# EAGLE board introAu (EAGLE 7.3.0)
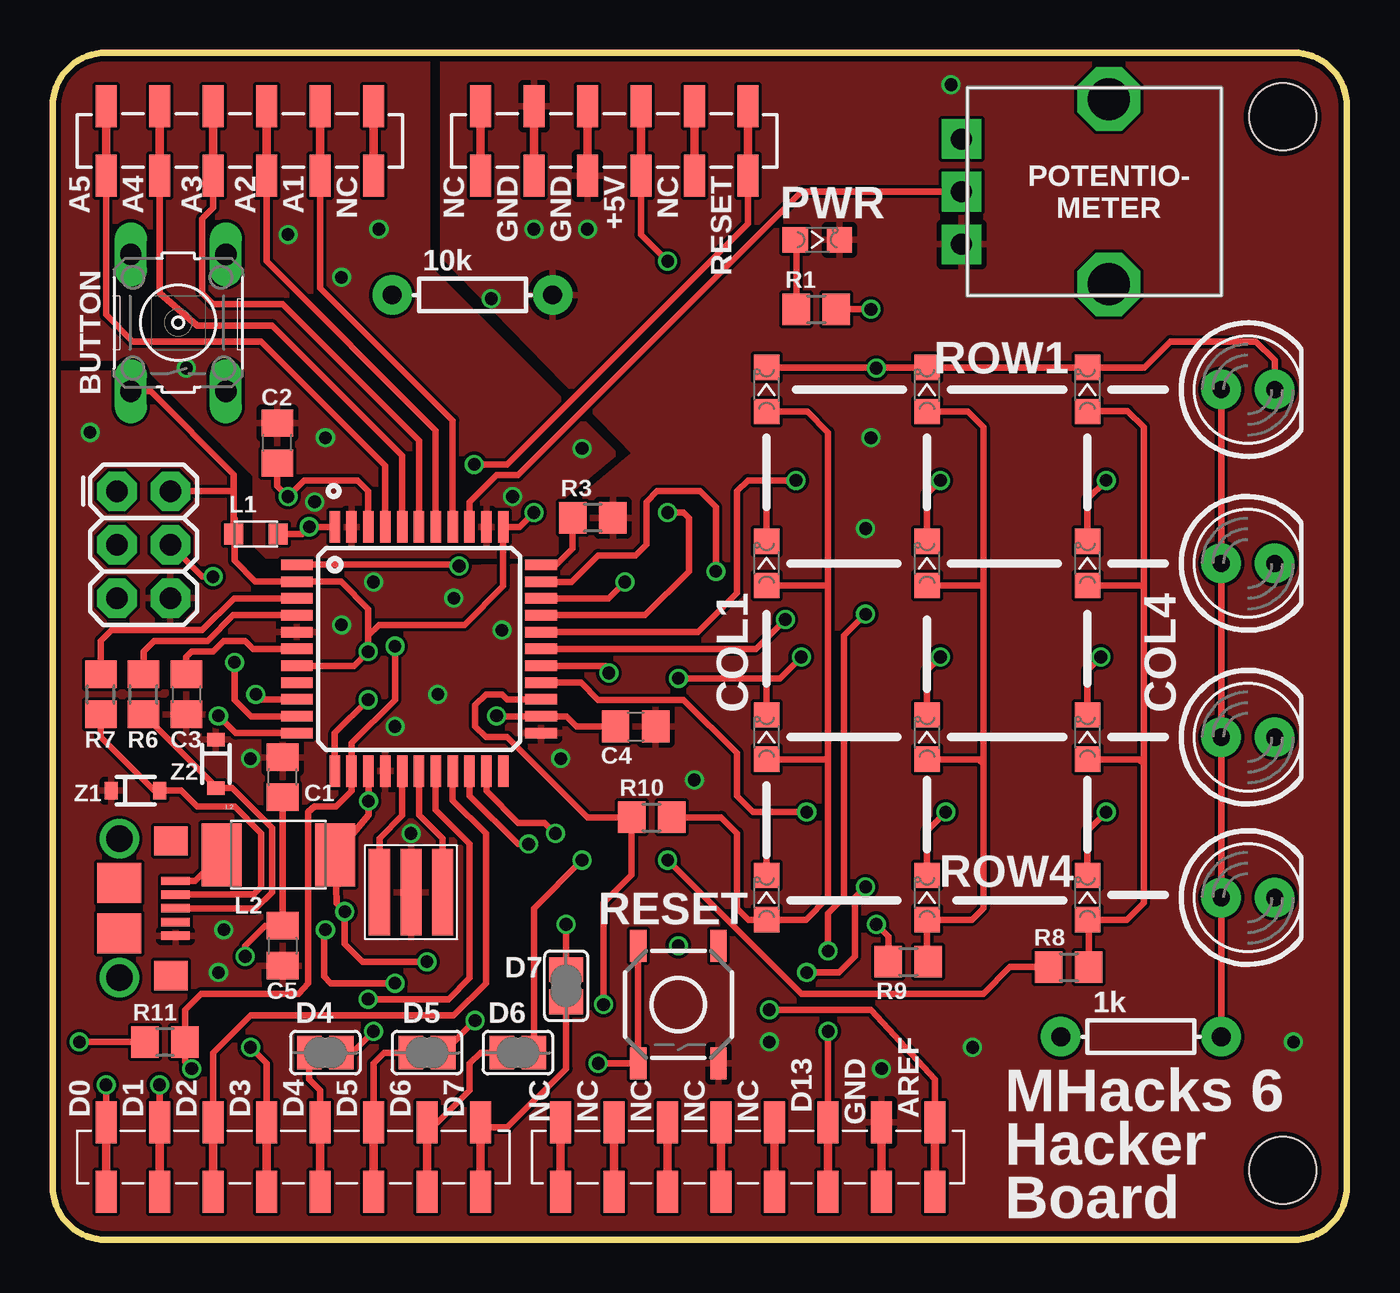
[diagram p0: board, top side]
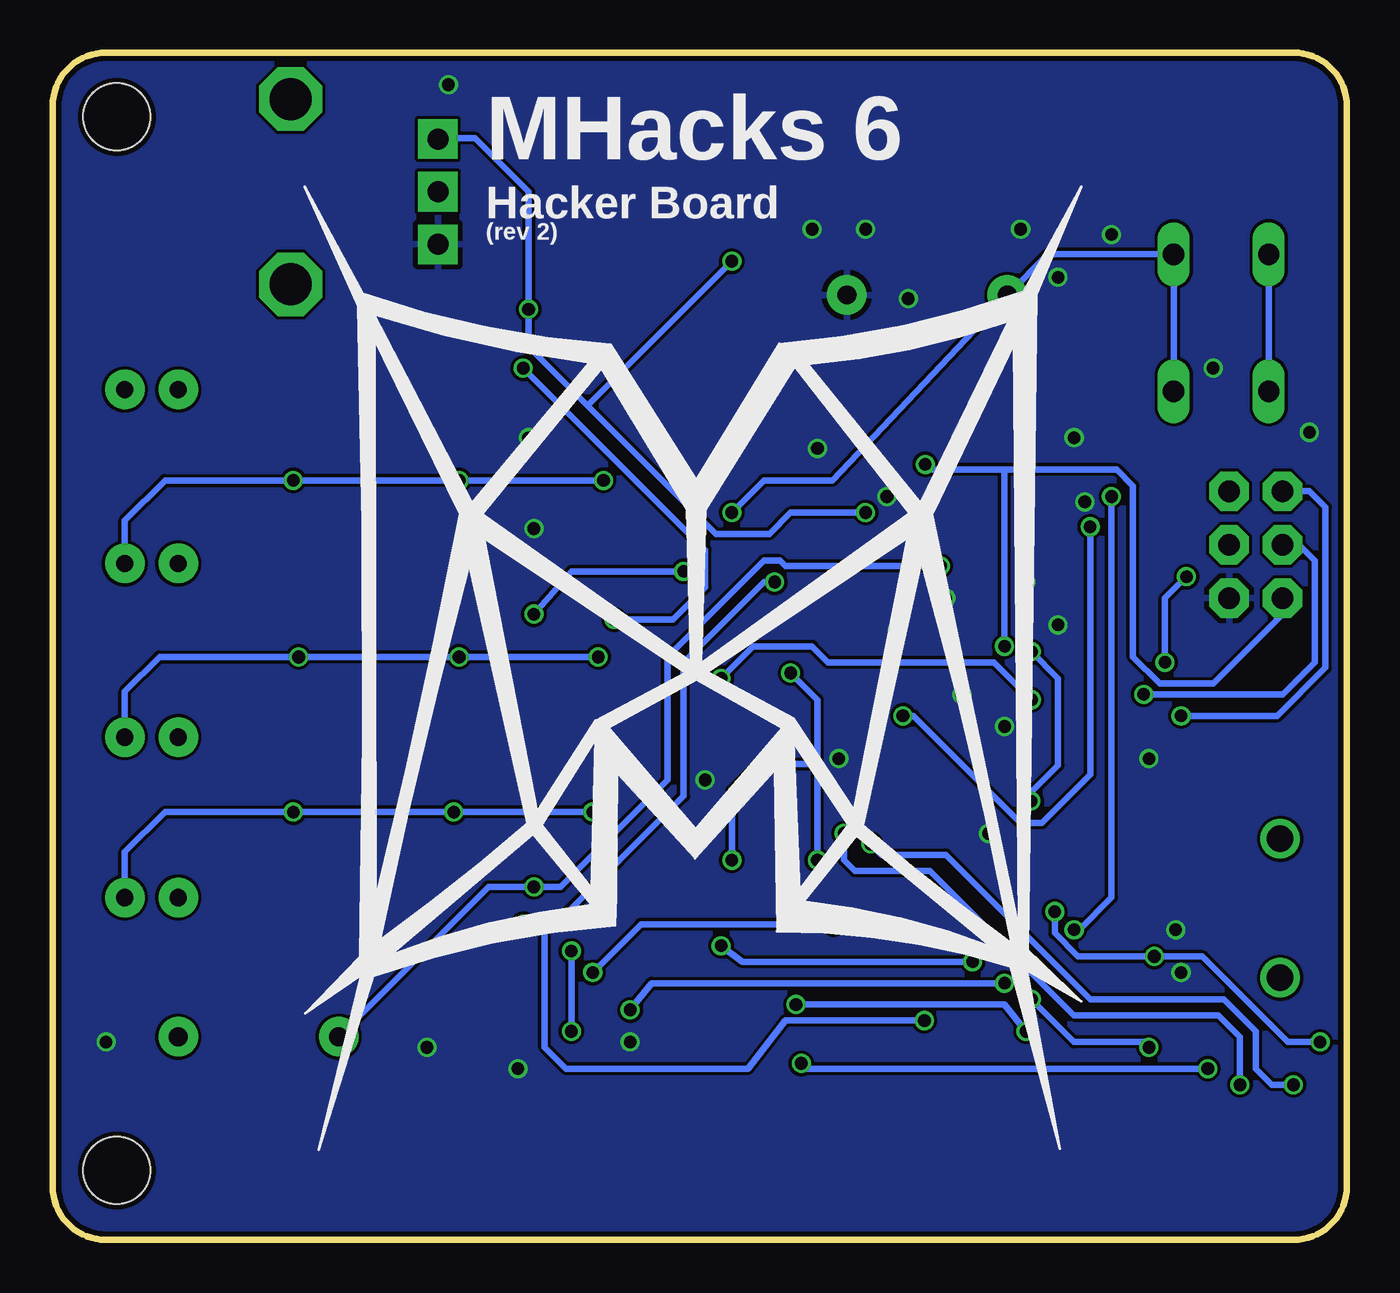
[diagram p1: board, bottom side, seen from below]

Size 61.47 x 56.39 mm. Coordinates in mm from the lower left corner, seen from the top.
Outline: 2.54,56.39 58.93,56.39 arc-90 61.47,53.85 61.47,2.54 arc-90 58.93,0 2.54,0 arc-90 0,2.54 0,53.85 arc-90 2.54,56.39
Copper layers (1*16): Top 0.035mm / dielectric 1.5mm / Bottom 0.035mm
Design rules "SeeedStudio_2layer_DRU_no_angle_20140221": minimum track width 6mil, minimum drill 12mil, track to track 6mil, track to pad 6mil, pad to pad 6mil, via to via 6mil, smd to smd 0mil, copper to edge 10mil, drill to drill 10mil, minimum pad ring 10mil, minimum via ring 6mil, stop-mask expansion 2mil, vias tented up to drill 100mil, thermal gap 10mil
Holes 3.17 mm at 58.42,3.3 58.42,53.34

## Footprints (pad centres in the part's own frame; a part is rotated, then mirrored left to right if it is on the bottom)
C0805 = smd 1.3 x 1.5: 1 -0.95,0; 2 0.95,0
SJ = smd 1.168 x 1.6: 1 -0.762,0; 2 0.762,0
1X06_SMD_STRAIGHT_COMBO = smd 1 x 2: 1 0,-1.65; 1-2 0,1.65; 2 2.54,1.65; 2-2 2.54,-1.65; 3 5.08,-1.65; 3-2 5.08,1.65; 4 7.62,1.65; 4-2 7.62,-1.65; 5 10.16,-1.65; 5-2 10.16,1.65; 6 12.7,1.65; 6-2 12.7,-1.65
1X08_SMD_COMBINED = smd 1 x 2: 1 0,1.65; 1@2 0,-1.65; 2 2.54,-1.65; 2@2 2.54,1.65; 3 5.08,1.65; 3@2 5.08,-1.65; 4 7.62,-1.65; 4@2 7.62,1.65; 5 10.16,1.65; 5@2 10.16,-1.65; 6 12.7,-1.65; 6@2 12.7,1.65; 7 15.24,1.65; 7@2 15.24,-1.65; 8 17.78,-1.65; 8@2 17.78,1.65
2X3 = drill 1.016 pad 1.88 octagon: 1 0,0; 2 0,2.54; 3 2.54,0; 4 2.54,2.54; 5 5.08,0; 6 5.08,2.54
WE-CBF_0805(W=3.0) = smd 0.9 x 1: 1 -1.05,0; 2 1.05,0
WE-CBF_1812(W=7.3) = smd 1.9 x 3: 1 -2.7,0; 2 2.7,0
LED5MM = drill 0.813 pad 1.88: A -1.27,0; K 1.27,0
CHIPLED_0805 = smd 1.2 x 1.2: A 0,-1.05; C 0,1.05
CERAMIC_RESONATOR_SMD = smd 1 x 4.1: 1 -1.5,0; 2 0,0; 3 1.5,0
R0805 = smd 1.3 x 1.5: 1 -0.95,0; 2 0.95,0
AXIAL-0.3EZ = drill 0.9 pad 1.88: P$1 -3.81,0; P$2 3.81,0
B3F-10XX = drill 1.016 long: 1 -3.251,2.261; 2 3.251,2.261; 3 -3.251,-2.261; 4 3.251,-2.261
TACTILE-SWITCH-SMD = smd 1.524 x 0.762: 1 -2.794,1.905; 2 2.794,1.905; 3 -2.794,-1.905; 4 2.794,-1.905
SPARKFUN-DIGITALIC_TQFP44 = smd 1.5 x 0.5: 1 -5.8,4; 2 -5.8,3.2; 3 -5.8,2.4; 4 -5.8,1.6; 5 -5.8,0.8; 6 -5.8,0; 7 -5.8,-0.8; 8 -5.8,-1.6; 9 -5.8,-2.4; 10 -5.8,-3.2; 11 -5.8,-4; 23 5.8,-4; 24 5.8,-3.2; 25 5.8,-2.4; 26 5.8,-1.6; 27 5.8,-0.8; 28 5.8,0; 29 5.8,0.8; 30 5.8,1.6; 31 5.8,2.4; 32 5.8,3.2; 33 5.8,4 | smd 0.5 x 1.5: 12 -4,-5.8; 13 -3.2,-5.8; 14 -2.4,-5.8; 15 -1.6,-5.8; 16 -0.8,-5.8; 17 0,-5.8; 18 0.8,-5.8; 19 1.6,-5.8; 20 2.4,-5.8; 21 3.2,-5.8; 22 4,-5.8; 34 4,5.8; 35 3.2,5.8; 36 2.4,5.8; 37 1.6,5.8; 38 0.8,5.8; 39 0,5.8; 40 -0.8,5.8; 41 -1.6,5.8; 42 -2.4,5.8; 43 -3.2,5.8; 44 -4,5.8
USB_MICROB_CHEAPER = smd 0.4 x 1.35: P$1 -1.3,0; P$2 -0.65,0; P$3 0,0; P$4 0.65,0; P$5 1.3,0 | smd 1.4 x 1.6: P$6 -3.2,-0.225; P$7 3.2,-0.225 | drill 1.25: P$8 -3.3,-2.675; P$9 3.3,-2.675 | smd 1.9 x 2.1: P$10 -1.2,-2.675; P$12 1.2,-2.675
ALPS_POT = drill 1 pad 1.88 square: P$1 7,-2.5; P$2 7,0; P$3 7,2.5 | drill 2 octagon: P$4 0,-4.4; P$5 0,4.4
SOD-323 = smd 0.63 x 0.83: 1 -1.15,0; 2 1.15,0

## Placement (x,y rotation side)
C1  100nF  [C0805]  10.92,21.97 90 top
C2  100nF  [C0805]  10.67,37.85 90 top
C3  1uF  [C0805]  6.35,25.91 270 top
C4  1uF  [C0805]  27.69,24.38 0 top
C5  10uF  [C0805]  10.92,13.97 270 top
D4  [SJ]  12.95,8.89 180 top
D5  [SJ]  17.78,8.89 180 top
D6  [SJ]  22.1,8.89 180 top
D7  [SJ]  24.38,12.06 270 top
JP1  [1X06_SMD_STRAIGHT_COMBO]  15.24,52.2 180 top
JP2  [1X06_SMD_STRAIGHT_COMBO]  33.02,52.2 180 top
JP3  [1X08_SMD_COMBINED]  20.32,3.94 180 top
JP4  [1X08_SMD_COMBINED]  41.91,3.94 180 top
JP5  [2X3]  3.05,35.56 270 top
L1  [WE-CBF_0805(W=3.0)]  9.65,33.53 0 top
L2  MF-MSMF050-2  [WE-CBF_1812(W=7.3)]  10.72,18.29 0 top
LED4  [LED5MM]  56.77,40.39 0 top
LED9  [LED5MM]  56.77,32.13 0 top
LED10  [LED5MM]  56.77,23.88 0 top
LED14  [LED5MM]  56.77,16.26 0 top
LED17  [CHIPLED_0805]  41.53,32.13 0 top
LED18  [CHIPLED_0805]  41.53,23.88 0 top
LED19  [CHIPLED_0805]  41.53,16.26 0 top
LED20  [CHIPLED_0805]  33.91,16.26 0 top
LED21  [CHIPLED_0805]  33.91,23.88 0 top
LED22  [CHIPLED_0805]  33.91,32.13 0 top
LED23  [CHIPLED_0805]  41.53,40.39 0 top
LED24  [CHIPLED_0805]  49.15,32.13 0 top
LED25  [CHIPLED_0805]  49.15,23.88 0 top
LED26  [CHIPLED_0805]  49.15,16.26 0 top
LED27  [CHIPLED_0805]  49.15,40.39 0 top
LED28  [CHIPLED_0805]  33.91,40.39 0 top
PWR  [CHIPLED_0805]  36.32,47.5 270 top
Q1  CERAMIC_RESONATOR_SMD  [CERAMIC_RESONATOR_SMD]  17.02,16.51 180 top
R1  1k  [R0805]  36.27,44.2 0 top
R2  1k  [AXIAL-0.3EZ]  51.69,9.65 0 top
R3  10k  [R0805]  25.65,34.29 180 top
R5  10k  [AXIAL-0.3EZ]  19.94,44.88 0 top
R6  22  [R0805]  4.32,25.91 90 top
R7  22  [R0805]  2.29,25.91 90 top
R8  1k  [R0805]  48.26,12.95 0 top
R9  1k  [R0805]  40.64,13.21 0 top
R10  1k  [R0805]  28.45,20.07 0 top
R11  10k  [R0805]  5.33,9.4 180 top
S1  [B3F-10XX]  5.97,43.56 90 top
S2  TAC_SWITCHSMD  [TACTILE-SWITCH-SMD]  29.72,11.18 270 top
U$1  [MHACKS6-BIG]  49.53,4.32 0 bottom
U$2  ATMEGA32U4TQFP  [SPARKFUN-DIGITALIC_TQFP44]  17.4,28.07 0 top
U$3  USB_MICROB_0001LF  [USB_MICROB_CHEAPER]  5.84,15.75 270 top
U$5  [ALPS_POT]  50.16,49.78 180 top
Z1  3.6V Zener  [SOD-323]  3.94,21.34 0 top
Z2  3.6V Zener  [SOD-323]  7.75,22.61 270 top

## Library data of the parts
C1-C5 R1 R3 R6-R11 = rcl
D4-D7 = jumper
JP1-JP5 = SparkFun-Connectors
L1 L2 = EagleLibrary_Wuerth_Elektronik_eiSos_rev15c
LED4 LED9 LED10 LED14 = SparkFun-LED
LED17-LED28 PWR = led
Q1 = MESH_Arduino
R2 R5 = SparkFun-Resistors; PROD_ID: RES-08380
S1 = MESH_Arduino; MPN: B3F-1000; OC_FARNELL: 176432; OC_NEWARK: 36M3542
S2 = mBLE; PROD_ID: SWCH-08247
U$1 = artwork
U$2 = SparkFun-DigitalIC
U$3 = mBLE
U$5 = SparkFun-Electromechanical
Z1 Z2 = SparkFun-DiscreteSemi

## Nets
+3V3: JP2.2
+5V: C1.1 C5.1 JP2.3 JP5.2 L1.1 L2.2 R1.2 R11.2 S1.1 S1.2 U$2.2 U$2.7 U$2.14 U$2.34 U$5.P$1
A1: JP1.2 U$2.37
A2: JP1.3 U$2.38
A3: JP1.4 U$2.39
A4: JP1.5 U$2.40
A5: JP1.6 U$2.41
AREF: C2.1 JP4.1 U$2.42
BUTTON: R5.P$1 S1.3 S1.4 U$2.30
COL1: LED20.A LED21.A LED22.A LED28.A R10.2
COL2: LED17.A LED18.A LED19.A LED23.A R9.2
COL3: LED24.A LED25.A LED26.A LED27.A R8.2
COL4: LED4.A LED9.A LED10.A LED14.A R2.P$2
D0: JP3.8 U$2.20
D1: JP3.7 U$2.21
D2: JP3.6 U$2.19
D3: JP3.5 U$2.18
D4: D4.1 R10.1 U$2.25
D5: D5.1 R9.1 U$2.31
D6: D6.1 R8.1 U$2.27
D7: D7.1 R2.P$1 U$2.1
D8: JP4.8
D9: JP4.7
D10: JP4.6
D11: JP4.5
D12: JP4.4
D13: JP4.3 U$2.32
D17: U$2.8
GND: C1.2 C2.2 C3.2 C4.2 C5.2 JP2.4 JP2.5 JP4.2 JP5.6 PWR.C Q1.2 R3.1 R5.P$2 S2.2 U$2.5 U$2.15 U$2.23 U$2.35 U$2.43 U$3.P$5 U$5.P$3 Z1.1 Z2.1
MISO: JP5.1 U$2.11
MOSI: JP5.4 U$2.10
N$1: L2.1 U$3.P$1
N$5: Q1.3 U$2.16
N$6: Q1.1 U$2.17
N$7: R7.1 U$3.P$2 Z1.2
N$8: R3.2 U$2.33
N$9: R6.1 U$3.P$3 Z2.2
N$10: C4.1 L1.2 U$2.24 U$2.44
N$11: PWR.A R1.1
N$12: D7.2 JP3.1
N$15: D5.2 JP3.3
N$16: D6.2 JP3.2
N$17: D4.2 JP3.4
POT: U$2.36 U$5.P$2
RD+: R6.2 U$2.4
RD-: R7.2 U$2.3
RESET: JP2.1 JP5.5 R11.1 S2.3 S2.4 U$2.13
ROW1: LED4.K LED23.C LED27.C LED28.C U$2.28
ROW2: LED9.K LED17.C LED22.C LED24.C U$2.29
ROW3: LED10.K LED18.C LED21.C LED25.C U$2.12
ROW4: LED14.K LED19.C LED20.C LED26.C U$2.26
SCK: JP5.3 U$2.9
TX: U$2.22
UCAP: C3.1 U$2.6
VIN: JP2.6

## Tracks (layer width: path | path; a pad name or v marks a point on that pad's centre or on a via)
+5V  (via drill 0.6)
  Top 0.305: U$2.7 14.31,27.27 v14.99,27.94 14.99,28.7 | U$2.14 v15,20.84 15,20.17 L2.2 | R1.2 v38.86,44.2 | 14.99,28.7 14.99,29.97 13.69,31.27 U$2.2 9.63,31.27 8.64,32.26 8.64,34.26 L1.1 8.6,35.56 | v22.86,34.54 22.18,33.87 U$2.34 21.4,31.05 19.56,29.21 15.49,29.21 14.99,28.7 | v17.78,13.21 14.73,13.21 13.88,14.06 v13.88,15.59 | 8.6,35.56 8.6,36.36 4.65,40.31 S1.1 | JP5.2 8.6,35.56 | C1.1 C5.1 10.09,14.92 9.14,13.97 v9.14,13.46 | JP2.3 27.94,47.75 v29.21,46.48 | R11.2 v1.27,9.4 | 13.62,16.92 L2.2 | 13.62,15.84 v13.88,15.59 | L2.2 13.49,15.97 v13.88,15.59
  Top 0.406: L2.2 13.75,18.67
  Bottom 0.305: S1.1 S1.2 | v15,20.84 15,21.25 13.72,22.53 13.72,26.67 v14.99,27.94 | v22.86,34.54 26.42,34.54 27.43,33.53 29.97,33.53 36.07,39.62 | v17.78,13.21 28.7,13.21 v29.72,13.97 | 36.07,39.62 38.86,42.42 v38.86,44.2 38.86,49.78 41.4,52.32 43.12,52.32 U$5.P$1 | v29.21,46.48 36.07,39.62 | v1.27,9.4 2.79,9.4 6.86,13.46 v9.14,13.46 12.77,13.46 13.88,14.57 v13.88,15.59
A1
  Top 0.305: U$2.37 19,38.91 12.7,45.21 JP1.2
A2
  Top 0.305: U$2.38 18.2,38.44 10.16,46.48 JP1.3
A3
  Top 0.305: U$2.39 17.4,37.97 10.92,44.45 7.62,44.45 7.11,44.96 7.11,48.51 7.62,49.02 JP1.4
A4
  Top 0.305: JP1.5 5.08,44.96 6.86,43.43 10.41,43.43 16.6,37.25 U$2.40
A5
  Top 0.305: U$2.41 15.8,36.78 9.91,42.67 3.81,42.67 2.54,43.94 JP1.6
AREF  (via drill 0.6)
  Top 0.305: JP4.1 41.91,7.62 38.86,10.92 v34.04,10.92 | U$2.42 14.99,33.88 14.99,35.56 14.48,36.07 11.94,36.07 v11.18,35.31 10.67,35.81 C2.1 | v16.26,12.19 13.21,12.19 12.89,12.51 12.89,14.67 v12.95,14.73
  Bottom 0.305: v34.04,10.92 33.02,12.19 v16.26,12.19 | v11.18,35.31 11.18,16.26 12.7,14.73 v12.95,14.73
BUTTON  (via drill 0.6)
  Top 0.305: U$2.30 28.14,29.67 30.23,31.75 30.23,34.29 29.97,34.54 v29.21,34.54
  Bottom 0.305: S1.3 S1.4 14.2,46.81 R5.P$1 24.43,36.07 27.69,36.07 v29.21,34.54
COL1
  Top 0.305: LED28.A 35.85,39.34 36.83,38.35 36.83,30.99 | 36.83,30.99 36.83,22.86 | 36.83,22.86 36.83,16.26 35.78,15.21 LED20.A 33.05,15.21 32.51,15.75 32.51,19.3 31.75,20.07 R10.2 | LED21.A 36.8,22.83 36.83,22.86 | LED22.A 36.74,31.08 36.83,30.99
COL2
  Top 0.305: LED23.A 43.47,39.34 44.2,38.61 44.2,30.99 | 44.2,30.99 44.2,22.61 | 44.2,22.61 44.2,15.75 43.65,15.21 LED19.A 41.53,13.27 R9.2 | LED18.A 43.98,22.83 44.2,22.61 | LED17.A 44.1,31.08 44.2,30.99
COL3
  Top 0.305: R8.2 49.21,15.01 LED26.A 51.02,15.21 51.82,16 51.82,22.61 | 51.82,22.61 51.82,30.99 | 51.82,30.99 51.82,38.61 51.05,39.37 49.18,39.37 LED27.A | LED25.A 51.6,22.83 51.82,22.61 | LED24.A 51.72,31.08 51.82,30.99
COL4
  Top 0.305: R2.P$2 LED14.A LED10.A LED9.A LED4.A
D0  (via drill 0.6)
  Top 0.305: U$2.20 19.8,21.09 22.1,18.8 v22.61,18.8 | v2.54,7.37 JP3.8
  Bottom 0.305: v22.61,18.8 22.1,18.29 19.05,18.29 12.19,11.43 5.84,11.43 4.32,9.91 4.32,8.13 3.56,7.37 v2.54,7.37
D1  (via drill 0.6)
  Top 0.305: U$2.21 20.6,21.31 22.1,19.81 23.37,19.81 v23.88,19.3 | v5.08,7.37 JP3.7
  Bottom 0.305: v5.08,7.37 5.08,9.65 6.1,10.67 12.95,10.67 19.81,17.53 23.37,17.53 23.88,18.03 v23.88,19.3
D2
  Top 0.305: U$2.19 19,20.88 20.57,19.3 20.57,12.19 19.05,10.67 9.4,10.67 7.62,8.89 JP3.6
D3  (via drill 0.6)
  Top 0.305: U$2.18 18.2,20.41 19.81,18.8 19.81,12.45 18.8,11.43 v14.99,11.43 | v9.4,9.14 10.16,8.38 JP3.5
  Bottom 0.305: v9.4,9.14 9.65,9.4 12.95,9.4 v14.99,11.43
D4  (via drill 0.6)
  Top 0.305: R10.1 25.4,20.07 21.59,23.88 20.57,23.88 20.07,24.38 20.07,25.4 20.57,25.91 21.34,25.91 21.58,25.67 U$2.25 | v26.16,11.18 26.16,16 27.5,17.34 R10.1 | 27.43,20.13 R10.1 | v15.24,9.91 14.22,8.89 D4.1
  Bottom 0.305: v26.16,11.18 16.26,11.18 v15.24,9.91
D5  (via drill 0.6)
  Top 0.305: U$2.31 26.4,30.47 v27.18,31.24 | v39.12,14.99 39.69,14.41 R9.1 | D5.1 v20.07,10.41
  Bottom 0.305: v39.12,14.99 38.1,14.99 | v20.07,10.41 26.67,10.41 28.45,8.13 37.08,8.13 38.1,9.14 38.1,14.99 | v27.18,31.24 27.69,31.24 31.5,27.43 31.5,21.08 37.59,14.99 38.1,14.99
D6  (via drill 0.6)
  Top 0.305: v26.42,26.92 26.25,27.27 U$2.27 | R8.1 45.47,12.95 44.2,11.68 35.56,11.68 v29.21,18.03 | D6.1 22.86,15.75 v25.15,18.03
  Bottom 0.305: v25.15,18.03 25.15,22.35 | 25.15,22.35 25.15,25.65 v26.42,26.92 | v29.21,18.03 29.21,21.34 27.94,22.61 25.4,22.61 25.15,22.35
D7  (via drill 0.6)
  Top 0.305: U$2.1 19.24,32.07 v19.3,32 | v35.81,12.7 37.34,12.7 38.1,13.46 38.1,16.26 v38.61,16.76 | D7.1 v24.38,14.99
  Bottom 0.305: v19.3,32 26.67,32 26.92,32.26 27.69,32.26 32.26,27.69 32.26,21.84 37.34,16.76 v38.61,16.76 40.77,16.76 R2.P$1 | v35.81,12.7 33.53,14.99 v24.38,14.99
D13  (via drill 0.6)
  Top 0.305: v36.83,9.91 JP4.3 | U$2.32 23.22,31.24 24.64,31.24 25.91,32.51 27.69,32.51 28.19,33.02 28.19,35.05 28.7,35.56 30.73,35.56 31.5,34.8 v31.5,31.75 | v36.83,13.72 36.83,15.49 37.59,16.26 37.59,28.7 v38.61,29.72
  Bottom 0.305: v31.5,31.75 36.83,31.75 v38.61,29.72 | v36.83,13.72 v36.83,9.91
GND  (via drill 0.6)
  other vias: 19.05,30.48 16.26,24.38 7.87,12.7 34.04,9.4 42.67,54.86 20.83,44.7 30.48,21.84 9.4,22.86 24.13,22.86 15.24,31.24 18.29,25.91 21.34,28.96 1.78,38.35 58.93,9.4 43.69,9.14 17.02,19.3 22.86,48.01 25.4,48.01 39.37,8.13 13.72,29.21 12.45,35.05 21.84,35.31 25.15,37.59 38.86,38.1 38.61,33.78 15.49,48.01 11.18,47.75 13.72,45.72 12.95,38.1 6.35,41.4 8.13,14.73
  pour Bottom: -0.76,-1.02 -0.76,57.66 62.74,57.66 62.74,-1.27
  pour Top: -1.27,57.66 17.78,57.66 17.78,46.23 26.67,37.34 23.88,35.05 23.88,32.51 10.16,32.51 9.65,33.02 9.65,36.32 4.06,41.91 -1.27,41.91
  pour Top: -1.27,41.15 3.81,41.15 8.89,36.07 8.89,31.75 24.64,32 24.64,34.8 27.69,37.34 18.54,46.74 18.54,57.66 62.74,57.66 62.74,-1.02 -1.27,-1.02
MISO  (via drill 0.6)
  Top 0.305: U$2.11 8.7,24.07 v7.87,24.89
  Bottom 0.305: JP5.1 1.78,35.56 1.02,34.8 1.02,27.18 3.3,24.89 v7.87,24.89
MOSI  (via drill 0.6)
  Top 0.305: U$2.10 9.42,24.87 8.64,25.65 v8.64,27.43 | v7.62,31.5 7.11,31.5 JP5.4
  Bottom 0.305: v8.64,27.43 8.64,30.48 v7.62,31.5
N$1
  Top 0.305: U$3.P$1 6.78,17.05 L2.1
N$5
  Top 0.305: Q1.3 15.52,19.07 16.6,20.16 U$2.16
N$6
  Top 0.305: Q1.1 18.52,19.07 17.4,20.19 U$2.17
N$7
  Top 0.305: R7.1 2.29,23.88 4.83,21.34 Z1.2 6.1,21.34 6.86,20.57 8.64,20.57 9.91,19.3 9.91,16.76 9.54,16.4 U$3.P$2
N$8
  Top 0.305: U$2.33 23.94,32.07 24.7,32.83 R3.2
N$9
  Top 0.305: U$3.P$3 9.65,15.75 10.41,16.51 10.41,19.56 8.52,21.46 Z2.2 7.75,21.53 R6.1
N$10  (via drill 0.6)
  Top 0.305: C4.1 24.89,24.38 24.41,24.87 U$2.24 21.11,24.87 v21.08,24.89 | U$2.44 v12.19,33.87 11.85,33.53 L1.2
  Bottom 0.305: v12.19,33.87 12.19,22.1 14.48,19.81 15.49,19.81 20.57,24.89 v21.08,24.89
N$11
  Top 0.305: 35.32,43.74 R1.1 35.32,47.19 PWR.A
N$12
  Top 0.305: JP3.1 20.32,5.33 21.59,5.33 24.38,8.13 D7.2
N$15
  Top 0.305: JP3.3 15.24,8.38 15.75,8.89 D5.2
N$16
  Top 0.305: JP3.2 18.29,5.59 19.81,7.11 19.81,8.38 20.32,8.89 D6.2
N$17
  Top 0.305: JP3.4 12.7,7.11 12.19,7.62 D4.2
POT
  Top 0.305: U$5.P$2 35.56,49.78 22.1,36.32 21.08,36.32 19.81,35.05 19.81,33.88 U$2.36
RD+
  Top 0.305: U$2.4 8.59,29.67 7.37,28.45 4.83,28.45 4.32,27.94 R6.2
RD-
  Top 0.305: U$2.3 8.62,30.47 7.11,28.96 2.79,28.96 2.29,28.45 R7.2
RESET  (via drill 0.6)
  Top 0.305: JP2.1 33.02,48.26 21.59,36.83 v20.02,36.83 | v16.26,28.19 16.26,25.65 14.2,23.6 U$2.13 14.2,21.31 13.46,20.57 12.45,20.57 12.14,20.32 12.14,12.19 11.68,11.68 7.05,11.68 6.28,10.92 R11.1 6.28,8.45 v6.6,8.13 | S2.3 S2.4 v25.91,8.38
  Bottom 0.305: 16.26,36.58 10.92,36.58 10.16,35.81 10.16,27.69 8.89,26.42 6.35,26.42 3.05,29.72 JP5.5 | 16.26,36.58 19.71,36.58 v20.02,36.83 | v6.6,8.13 25.65,8.13 v25.91,8.38 | v16.26,28.19 16.26,36.58
ROW1  (via drill 0.6)
  Top 0.305: LED4.K 58.04,41.78 57.15,42.67 53.09,42.67 51.85,41.44 LED27.C LED23.C 39.15,41.44 v39.12,41.4 39.08,41.44 LED28.C | U$2.28 33.4,28.07 v34.8,29.46
  Bottom 0.305: v34.8,29.46 32,29.46 30.48,30.99 30.48,32.77 38.61,40.89 v39.12,41.4
ROW2  (via drill 0.6)
  Top 0.305: v50.04,36.07 49.15,35.18 LED24.C | LED17.C 41.53,35.43 v42.16,36.07 | LED22.C 33.91,35.94 34.04,36.07 | U$2.29 30.64,28.87 32.51,30.73 32.51,35.56 33.02,36.07 34.04,36.07 | 34.04,36.07 v35.31,36.07
  Bottom 0.305: LED9.K 58.04,34.16 56.13,36.07 v50.04,36.07 v42.16,36.07 v35.31,36.07
ROW3  (via drill 0.6)
  Top 0.305: v49.78,27.69 49.15,27.05 LED25.C | LED18.C 41.53,27.05 v42.16,27.69 | LED21.C 33.91,26.54 34.04,26.67 | U$2.12 13.4,24.07 v14.99,25.65 | v29.72,26.67 34.04,26.67 | 34.04,26.67 34.54,26.67 v35.56,27.69
  Bottom 0.305: LED10.K 58.04,26.04 56.39,27.69 v49.78,27.69 v42.16,27.69 v35.56,27.69 | v14.99,25.65 16.76,27.43 24.64,27.43 25.4,28.19 28.19,28.19 v29.72,26.67
ROW4  (via drill 0.6)
  Top 0.305: v50.04,20.32 49.15,19.43 LED26.C | LED19.C 41.53,19.43 v42.42,20.32 | LED20.C 33.91,20.19 34.04,20.32 | U$2.26 25.09,26.47 25.91,25.65 29.97,25.65 32.51,23.11 32.51,21.08 33.27,20.32 34.04,20.32 | 34.04,20.32 v35.81,20.32
  Bottom 0.305: LED14.K 58.04,18.41 56.13,20.32 v50.04,20.32 v42.42,20.32 v35.81,20.32
SCK  (via drill 0.6)
  Top 0.305: U$2.9 9.89,25.67 v9.65,25.91
  Bottom 0.305: v9.65,25.91 3.05,25.91 1.52,27.43 1.52,32.26 2.29,33.02 JP5.3
UCAP
  Top 0.305: U$2.6 9.53,28.07 9.14,28.45 8.13,28.45 7.62,27.94 6.6,27.94 6.35,27.69 C3.1

## Text on the board
tNames: A5 | A4 | A3 | A2 | A1 | NC | NC | GND | GND | +5V | NC | RESET | POTENTIO- / METER | PWR | R1 | ROW1 | BUTTON | C2 | L1 | R3 | COL1 | COL4 | R7 | R6 | C3 | C4 | Z2 | Z1 | C1 | R10 | ROW4 | L2 | RESET | R8 | R9 | R11 | AREF | D13 | GND | D0 | D1 | D2 | D3 | D4 | D5 | D6 | D7 | NC | NC | NC | NC | NC | MHacks 6 / Hacker / Board
bNames: MHacks 6 | Hacker Board | (rev 2)